# Altium PCB PCB1.PcbDoc (part 1 of 2)
Units mil, origin at the board's own origin, x right, y up, seen from the top; angles counter-clockwise.
Board outline 6380 x 3360 mil, 2 copper layers (Top Layer, Bottom Layer); 138 components, 156 nets, 538 pads, 20 vias.
Unrouted connection lines stored in the file: 3.
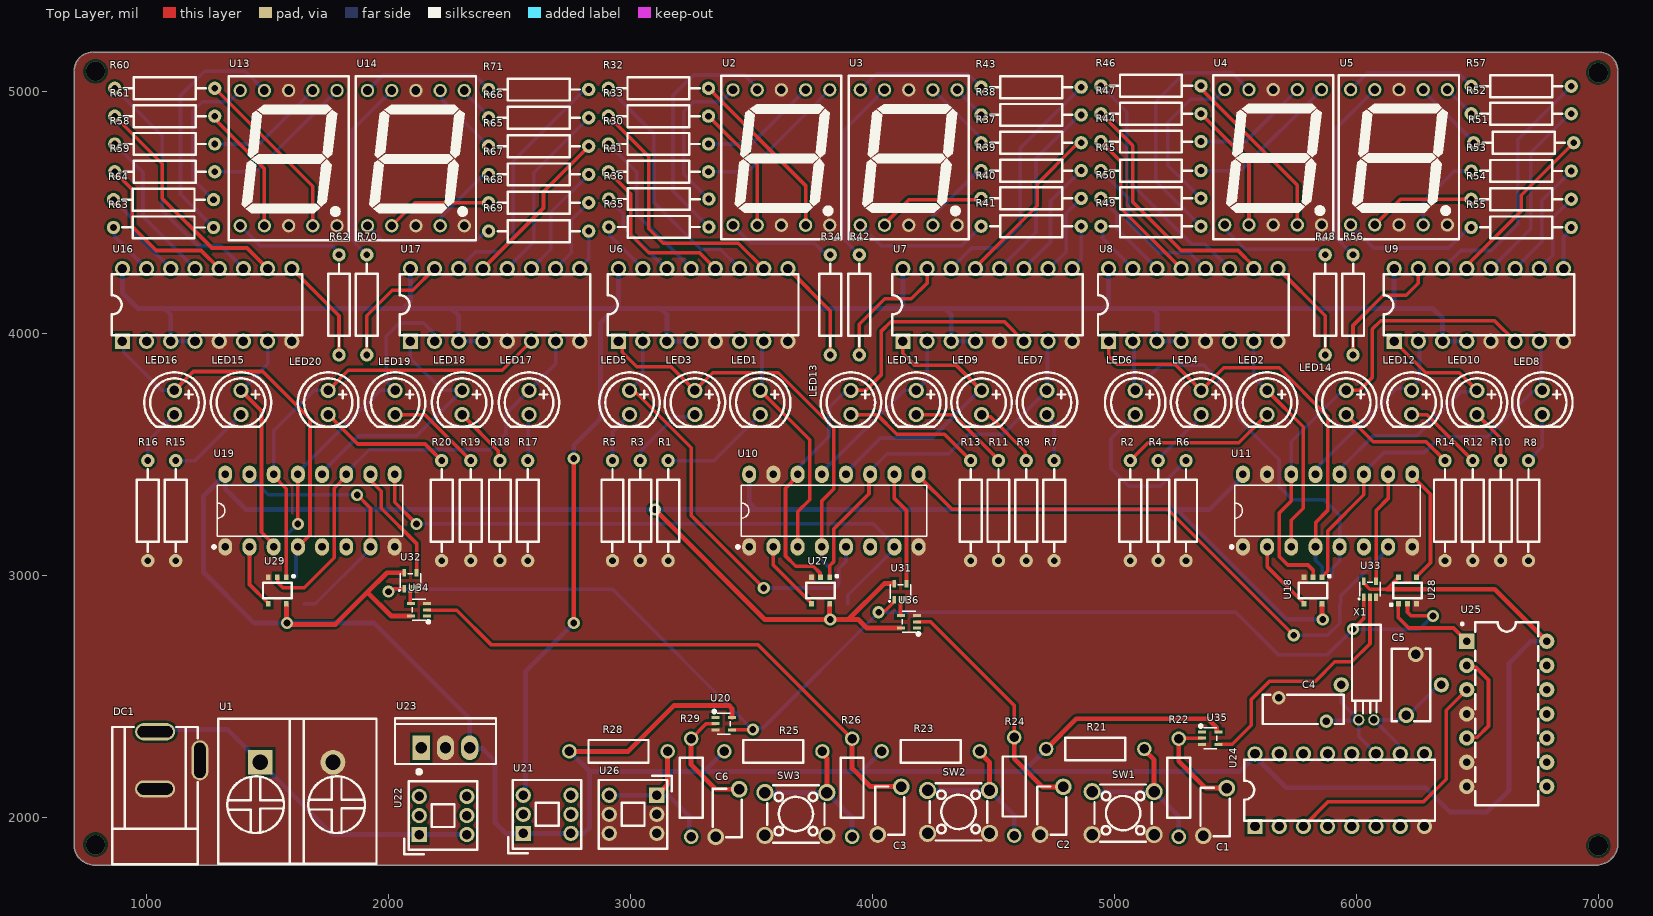
[diagram p0: Top Layer view]
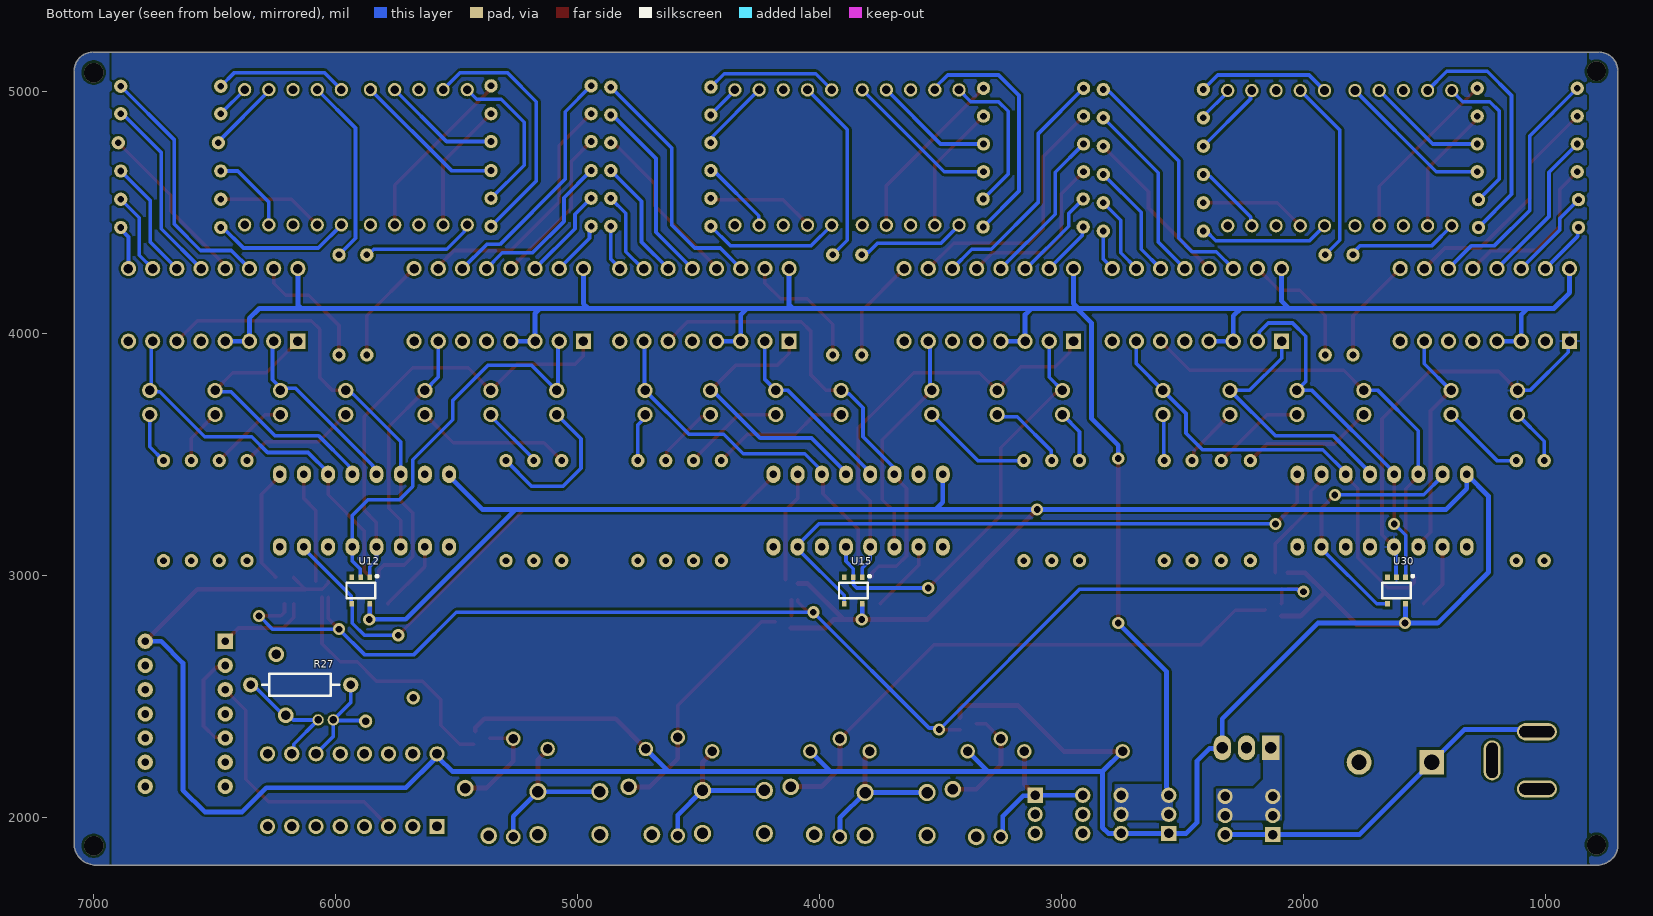
[diagram p1: Bottom Layer view, seen from below]

## Layer stack, top to bottom
Top Solder: solder mask 0.4, Solder Resist, Dk 3.5
Top Layer: signal copper 1.4
Dielectric 1: dielectric 12.6, FR-4, Dk 4.8
Bottom Layer: signal copper 1.4
Bottom Solder: solder mask 0.4, Solder Resist, Dk 3.5

## Board outline
785,1805 6990,1805 ccw(c6990,1895) 7080,1895 7080,5085 ccw(c7000.01,5085.01) 7000,5165 780,5165 ccw(c780,5085) 700,5085 700,1890 ccw(c785,1890)

## Design rules (kind name [scope] priority, off if disabled: settings)
Clearance [All] p1: gap=10 ignorepadtopadclearanceinfootprint=FALSE except(8: SMDPad-SMDPad)
PolygonConnect PolygonConnect_5 [All vs IsNamedPolygon('GND_L01_P005')] p1: connectstyle=Direct reliefconductorwidth=10 reliefentries=4 polygonreliefangle="90 Angle" airgapwidth=10
PolygonConnect PolygonConnect_4 [All vs IsNamedPolygon('NONET_L02_P005')] p2: connectstyle=Direct reliefconductorwidth=10 reliefentries=4 polygonreliefangle="90 Angle" airgapwidth=10
PolygonConnect PolygonConnect_3 [All vs IsNamedPolygon('NONET_L-01_P-001')] p3: connectstyle=Direct reliefconductorwidth=10 reliefentries=4 polygonreliefangle="90 Angle" airgapwidth=10
PolygonConnect PolygonConnect_2 [All vs IsNamedPolygon('NONET_L-01_P-001')] p4: thpad.connectstyle=Direct thpad.reliefconductorwidth=10 thpad.reliefentries=4 thpad.polygonreliefangle="90 Angle" thpad.airgapwidth=10 smdpad.connectstyle=Direct smdpad.reliefconductorwidth=10 smdpad.reliefentries=4 smdpad.polygonreliefangle="90 Angle" smdpad.airgapwidth=10 via.connectstyle=Relief via.reliefconductorwidth=10 via.reliefentries=4 via.polygonreliefangle="90 Angle" via.airgapwidth=10
PolygonConnect PolygonConnect_1 [All vs IsNamedPolygon('NONET_L-01_P-001')] p5: connectstyle=Direct reliefconductorwidth=10 reliefentries=4 polygonreliefangle="90 Angle" airgapwidth=10
PolygonConnect [All] p6: connectstyle=Relief reliefconductorwidth=10 reliefentries=4 polygonreliefangle="90 Angle" airgapwidth=10
RoutingVias [All] p1: holewidth=28 width=50 viastyle="Through Hole" minholewidth=28 minwidth=50 maxholewidth=28 maxwidth=50
SolderMaskExpansion [All] p1: expansion=4 istentingtop=FALSE
SupplyNets "Schematic Supply Nets_3" [InNet('GND')] p1: voltage=0.000
SupplyNets "Schematic Supply Nets_1" [InNet('+D5V')] p2: voltage=0.000
SupplyNets "Schematic Supply Nets" [InNet('+5')] p3: voltage=0.000
Width [All] p1: maxlimit=50 minlimit=10 preferedwidth=15 minimp=50.000000 maximp=50.000000 favimp=50.000000
30 further rules are at their usual default settings.

## Classes and differential pairs
component class Display_SEC_MIN: LED1 LED2 LED3 LED4 LED5 LED6 LED7 LED8 LED9 LED10 LED11 LED12 LED13 LED14 R1 R2 R3 R4 R5 R6 R7 R8 R9 R10 R11 R12 R13 R14 R30 R31 R32 R33 R34 R35 R36 R37 R38 R39 R40 R41 R42 R43 R44 R45 R46 R47 R48 R49 R50 R51 R52 R53 R54 R55 R56 R57 U2 U3 U4 U5 U6 U7 U8 U9 U10 U11
component class Display_Hour: LED15 LED16 LED17 LED18 LED19 LED20 R15 R16 R17 R18 R19 R20 R58 R59 R60 R61 R62 R63 R64 R65 R66 R67 R68 R69 R70 R71 U12 U13 U14 U15 U16 U17 U18 U19 U20 U27 U28 U29 U30 U31 U32 U33 U34 U35 U36
component class CLK_SW: C1 C2 C3 C4 C5 C6 DC1 R21 R22 R23 R24 R25 R26 R27 R28 R29 SW1 SW2 SW3 U1 U21 U22 U23 U24 U25 U26 X1

## Components (designator, comment, footprint, x,y, rotation, side; value= is the part's Value field where it differs from the comment)
C1 "100pF" CAP-TH_L5.0-W3.0-P5.00-D0.6-S2.45 5415,2025 r90 top locked
C2 "100pF" CAP-TH_L5.0-W3.0-P5.00-D0.6-S2.45 4740,2030 r90 top locked
C3 "100pF" CAP-TH_L5.0-W3.0-P5.00-D0.6-S2.45 4070,2030 r90 top locked
C4 "560pF" CAP-TH_L8.5-W3.0-P5.00-D0.6-S2.5 5776.58,2448.23 r0 top
C5 "22pF" CAP-TH_L7.4-W4.0-P6.40-D0.5-S1.00 6225,2550 r270 top
C6 "100pF" CAP-TH_L5.0-W3.0-P5.00-D0.6-S2.45 3400,2020 r90 top locked
DC1 "DC-005-2.5A-2.0" CONN-TH_DC-005-2.5A-2.0 1127.53,2238.1 r90 top locked
LED1 "WP7113ID" LED-TH_BD5.0-P2.54-FD 3535.52,3716.7 r270 top locked
LED2 "WP7113ID" LED-TH_BD5.0-P2.54-FD 5630,3716.7 r270 top locked
LED3 "WP7113ID" LED-TH_BD5.0-P2.54-FD 3265.52,3716.7 r270 top locked
LED4 "WP7113ID" LED-TH_BD5.0-P2.54-FD 5357.5,3716.7 r270 top locked
LED5 "WP7113ID" LED-TH_BD5.0-P2.54-FD 2995.52,3716.7 r270 top locked
LED6 "WP7113ID" LED-TH_BD5.0-P2.54-FD 5085,3716.7 r270 top locked
LED7 "WP7113ID" LED-TH_BD5.0-P2.54-FD 4720.21,3716.7 r270 top locked
LED8 "WP7113ID" LED-TH_BD5.0-P2.54-FD 6767.15,3716.7 r270 top locked
LED9 "WP7113ID" LED-TH_BD5.0-P2.54-FD 4450.21,3716.7 r270 top locked
LED10 "WP7113ID" LED-TH_BD5.0-P2.54-FD 6497.15,3716.7 r270 top locked
LED11 "WP7113ID" LED-TH_BD5.0-P2.54-FD 4180.21,3716.7 r270 top locked
LED12 "WP7113ID" LED-TH_BD5.0-P2.54-FD 6227.15,3716.7 r270 top locked
LED13 "WP7113ID" LED-TH_BD5.0-P2.54-FD 3910.21,3716.7 r270 top locked
LED14 "WP7113ID" LED-TH_BD5.0-P2.54-FD 5957.15,3716.7 r270 top locked
LED15 "WP7113ID" LED-TH_BD5.0-P2.54-FD 1390,3716.7 r270 top locked
LED16 "WP7113ID" LED-TH_BD5.0-P2.54-FD 1115,3716.7 r270 top locked
LED17 "WP7113ID" LED-TH_BD5.0-P2.54-FD 2580.21,3716.7 r270 top locked
LED18 "WP7113ID" LED-TH_BD5.0-P2.54-FD 2303.55,3716.7 r270 top locked
LED19 "WP7113ID" LED-TH_BD5.0-P2.54-FD 2026.88,3716.7 r270 top locked
LED20 "WP7113ID" LED-TH_BD5.0-P2.54-FD 1750.21,3716.7 r270 top locked
R1 "330Ω" RES-TH_BD2.3-L6.5-P10.50-D0.5 3155,3270 r270 top locked
R2 "330Ω" RES-TH_BD2.3-L6.5-P10.50-D0.5 5065,3270 r270 top locked
R3 "330Ω" RES-TH_BD2.3-L6.5-P10.50-D0.5 3040,3270 r270 top locked
R4 "330Ω" RES-TH_BD2.3-L6.5-P10.50-D0.5 5180,3270 r270 top locked
R5 "330Ω" RES-TH_BD2.3-L6.5-P10.50-D0.5 2925,3270 r270 top locked
R6 "330Ω" RES-TH_BD2.3-L6.5-P10.50-D0.5 5295,3270 r270 top locked
R7 "330Ω" RES-TH_BD2.3-L6.5-P10.50-D0.5 4750,3270 r90 top locked
R8 "330Ω" RES-TH_BD2.3-L6.5-P10.50-D0.5 6710,3270 r90 top locked
R9 "330Ω" RES-TH_BD2.3-L6.5-P10.50-D0.5 4635,3270 r90 top locked
R10 "330Ω" RES-TH_BD2.3-L6.5-P10.50-D0.5 6595,3270 r90 top locked
R11 "330Ω" RES-TH_BD2.3-L6.5-P10.50-D0.5 4520,3270 r90 top locked
R12 "330Ω" RES-TH_BD2.3-L6.5-P10.50-D0.5 6480,3270 r90 top locked
R13 "330Ω" RES-TH_BD2.3-L6.5-P10.50-D0.5 4405,3270 r90 top locked
R14 "330Ω" RES-TH_BD2.3-L6.5-P10.50-D0.5 6365,3270 r90 top locked
R15 "330Ω" RES-TH_BD2.3-L6.5-P10.50-D0.5 1120,3270 r270 top locked
R16 "330Ω" RES-TH_BD2.3-L6.5-P10.50-D0.5 1005,3270 r270 top locked
R17 "330Ω" RES-TH_BD2.3-L6.5-P10.50-D0.5 2575,3270 r90 top locked
R18 "330Ω" RES-TH_BD2.3-L6.5-P10.50-D0.5 2460.04,3270 r90 top locked
R19 "330Ω" RES-TH_BD2.3-L6.5-P10.50-D0.5 2339.48,3270 r90 top locked
R20 "330Ω" RES-TH_BD2.3-L6.5-P10.50-D0.5 2218.93,3270 r90 top locked
R21 "10kΩ" RES-TH_BD2.4-L6.3-P10.30-D0.6 4920,2285 r180 top locked
R22 "10kΩ" RES-TH_BD2.4-L6.3-P10.30-D0.6 5265,2125 r270 top locked
R23 "10kΩ" RES-TH_BD2.4-L6.3-P10.30-D0.6 4240,2275 r180 top locked
R24 "10kΩ" RES-TH_BD2.4-L6.3-P10.30-D0.6 4585,2130 r270 top locked
R25 "10kΩ" RES-TH_BD2.4-L6.3-P10.30-D0.6 3590,2275 r180 top locked
R26 "10kΩ" RES-TH_BD2.4-L6.3-P10.30-D0.6 3915,2125 r270 top locked
R27 "10MΩ" RES-TH_BD2.2-L6.5-P10.50-D0.6 6143.31,2550 r0 bottom
R28 "10kΩ" RES-TH_BD2.4-L6.3-P10.30-D0.6 2950,2275 r180 top locked
R29 "10kΩ" RES-TH_BD2.4-L6.3-P10.30-D0.6 3250,2125 r270 top locked
R30 "330Ω" RES-TH_BD2.3-L6.5-P10.50-D0.5 3115,4785 r0 top locked
R31 "330Ω" RES-TH_BD2.3-L6.5-P10.50-D0.5 3115,4670 r0 top locked
R32 "330Ω" RES-TH_BD2.3-L6.5-P10.50-D0.5 3115,5015 r0 top locked
R33 "330Ω" RES-TH_BD2.3-L6.5-P10.50-D0.5 3115,4900 r0 top locked
R34 "330Ω" RES-TH_BD2.3-L6.5-P10.50-D0.5 3825,4120 r90 top locked
R35 "330Ω" RES-TH_BD2.3-L6.5-P10.50-D0.5 3116.75,4441.96 r0 top locked
R36 "330Ω" RES-TH_BD2.3-L6.5-P10.50-D0.5 3116.75,4557.57 r0 top locked
R37 "330Ω" RES-TH_BD2.3-L6.5-P10.50-D0.5 4655,4790 r180 top locked
R38 "330Ω" RES-TH_BD2.3-L6.5-P10.50-D0.5 4655,4905 r180 top locked
R39 "330Ω" RES-TH_BD2.3-L6.5-P10.50-D0.5 4655,4675 r180 top locked
R40 "330Ω" RES-TH_BD2.3-L6.5-P10.50-D0.5 4655,4560 r180 top locked
R41 "330Ω" RES-TH_BD2.3-L6.5-P10.50-D0.5 4655,4445 r180 top locked
R42 "330Ω" RES-TH_BD2.3-L6.5-P10.50-D0.5 3945,4120 r90 top locked
R43 "330Ω" RES-TH_BD2.3-L6.5-P10.50-D0.5 4655,5020 r180 top locked
R44 "330Ω" RES-TH_BD2.3-L6.5-P10.50-D0.5 5150,4795 r0 top locked
R45 "330Ω" RES-TH_BD2.3-L6.5-P10.50-D0.5 5150,4675 r0 top locked
R46 "330Ω" RES-TH_BD2.3-L6.5-P10.50-D0.5 5150,5025 r0 top locked
R47 "330Ω" RES-TH_BD2.3-L6.5-P10.50-D0.5 5150,4910 r0 top locked
R48 "330Ω" RES-TH_BD2.3-L6.5-P10.50-D0.5 5870,4120 r90 top locked
R49 "330Ω" RES-TH_BD2.3-L6.5-P10.50-D0.5 5150,4445 r0 top locked
R50 "330Ω" RES-TH_BD2.3-L6.5-P10.50-D0.5 5150,4560.83 r0 top locked
R51 "330Ω" RES-TH_BD2.3-L6.5-P10.50-D0.5 6690,4790 r180 top locked
R52 "330Ω" RES-TH_BD2.3-L6.5-P10.50-D0.5 6680,4910 r180 top locked
R53 "330Ω" RES-TH_BD2.3-L6.5-P10.50-D0.5 6680,4673.33 r180 top locked
R54 "330Ω" RES-TH_BD2.3-L6.5-P10.50-D0.5 6680,4556.67 r180 top locked
R55 "330Ω" RES-TH_BD2.3-L6.5-P10.50-D0.5 6680,4440 r180 top locked
R56 "330Ω" RES-TH_BD2.3-L6.5-P10.50-D0.5 5985,4120 r90 top locked
R57 "330Ω" RES-TH_BD2.3-L6.5-P10.50-D0.5 6680,5023.33 r180 top locked
R58 "330Ω" RES-TH_BD2.3-L6.5-P10.50-D0.5 1075,4785 r0 top locked
R59 "330Ω" RES-TH_BD2.3-L6.5-P10.50-D0.5 1075,4670 r0 top locked
R60 "330Ω" RES-TH_BD2.3-L6.5-P10.50-D0.5 1075,5015 r0 top locked
R61 "330Ω" RES-TH_BD2.3-L6.5-P10.50-D0.5 1075,4900 r0 top locked
R62 "330Ω" RES-TH_BD2.3-L6.5-P10.50-D0.5 1795,4120 r90 top locked
R63 "330Ω" RES-TH_BD2.3-L6.5-P10.50-D0.5 1070,4440 r0 top locked
R64 "330Ω" RES-TH_BD2.3-L6.5-P10.50-D0.5 1070,4555 r0 top locked
R65 "330Ω" RES-TH_BD2.3-L6.5-P10.50-D0.5 2620,4776 r180 top locked
R66 "330Ω" RES-TH_BD2.3-L6.5-P10.50-D0.5 2620,4893 r180 top locked
R67 "330Ω" RES-TH_BD2.3-L6.5-P10.50-D0.5 2620,4659 r180 top locked
R68 "330Ω" RES-TH_BD2.3-L6.5-P10.50-D0.5 2620,4542 r180 top locked
R69 "330Ω" RES-TH_BD2.3-L6.5-P10.50-D0.5 2620,4425 r180 top locked
R70 "330Ω" RES-TH_BD2.3-L6.5-P10.50-D0.5 1910,4120 r90 top locked
R71 "330Ω" RES-TH_BD2.3-L6.5-P10.50-D0.5 2620,5010 r180 top locked
SW1 "TS665CJ" SW-TH_4P-L6.0-W6.0-P4.50-LS6.5 5035,2020 r0 top locked
SW2 "TS665CJ" SW-TH_4P-L6.0-W6.0-P4.50-LS6.5 4355,2025 r0 top locked
SW3 "TS665CJ" SW-TH_4P-L6.0-W6.0-P4.50-LS6.5 3682.95,2016.42 r0 top locked
U1 "DBT50G-7.62-2P" CONN-TH_2P-P7.62_L15.2-W16.7-EX4.2 1620,2230 r0 top locked
U2 "HDSP-5501" LED-SEG-TH_HDSP-A 3623.03,4729.02 r0 top locked
U3 "HDSP-5501" LED-SEG-TH_HDSP-A 4149.09,4729.02 r0 top locked
U4 "HDSP-5501" LED-SEG-TH_HDSP-A 5655,4730 r0 top locked
U5 "HDSP-5501" LED-SEG-TH_HDSP-A 6175,4730 r0 top locked
U6 "CD4511BE" DIP-16_L19.8-W6.5-P2.54-LS7.6-BL 3300,4120 r0 top locked
U7 "CD4511BE" DIP-16_L19.8-W6.5-P2.54-LS7.6-BL 4475.01,4120 r0 top locked
U8 "CD4511BE" DIP-16_L19.8-W6.5-P2.54-LS7.6-BL 5325.01,4120 r0 top locked
U9 "CD4511BE" DIP-16_L19.8-W6.5-P2.54-LS7.6-BL 6505.01,4120 r0 top locked
U10 "CD4518BE" DIP-16_L19.3-W6.4-P2.54-LS7.6-BL 3840,3270 r0 top locked
U11 "CD4518BE" DIP-16_L19.3-W6.4-P2.54-LS7.6-BL 5880,3270 r0 top locked
U12 "BD7LS08G-CTL" SSOP-5_L3.0-W1.6-P0.95-LS2.8-BR 5895,2940 r90 bottom locked
U13 "HDSP-5501" LED-SEG-TH_HDSP-A 1586.86,4726.42 r0 top locked
U14 "HDSP-5501" LED-SEG-TH_HDSP-A 2112.92,4726.42 r0 top locked
U15 "BD7LS08G-CTL" SSOP-5_L3.0-W1.6-P0.95-LS2.8-BR 3860,2940 r90 bottom
U16 "CD4511BE" DIP-16_L19.8-W6.5-P2.54-LS7.6-BL 1250.01,4120 r0 top locked
U17 "CD4511BE" DIP-16_L19.8-W6.5-P2.54-LS7.6-BL 2440,4120 r0 top locked
U18 "BD7LS08G-CTL" SSOP-5_L3.0-W1.6-P0.95-LS2.8-BR 5820,2940 r90 top locked
U19 "CD4518BE" DIP-16_L19.3-W6.4-P2.54-LS7.6-BL 1675,3270 r0 top locked
U20 "SN74AHC1GU04DCKR" SOT-353_L2.1-W1.3-P0.65-LS2.3-BR 3385,2390 r180 top
U21 "PS-7054DVB-6PL" SW-TH_6P-L7.0-W7.0-P2.00 2655,2015 r180 top locked
U22 "PS-7054DVB-6PL" SW-TH_6P-L7.0-W7.0-P2.00 2225,2010 r180 top locked
U23 "L7805CV-DG" TO-220-3_L10.0-W4.5-P2.54-L 2235,2290 r0 top locked
U24 "CD4060BE" DIP-16_L19.8-W6.5-P2.54-LS7.6-BL 5930,2115 r0 top locked
U25 "CD4013BE" DIP-14_L19.2-W6.6-P2.54-LS10.9-BL 6620.35,2430 r270 top
U26 "PS-7054DVB-6PL" SW-TH_6P-L7.0-W7.0-P2.00 3010,2015 r0 top locked
U27 "BD7LS08G-CTL" SSOP-5_L3.0-W1.6-P0.95-LS2.8-BR 3785,2940 r90 top locked
U28 "BD7LS08G-CTL" SSOP-5_L3.0-W1.6-P0.95-LS2.8-BR 6210,2940 r270 top
U29 "BD7LS08G-CTL" SSOP-5_L3.0-W1.6-P0.95-LS2.8-BR 1540,2940 r90 top locked
U30 "BD7LS08G-CTL" SSOP-5_L3.0-W1.6-P0.95-LS2.8-BR 1615,2940 r90 bottom locked
U31 "TC7SET32FU,LJ(CT" TSSOP-5_L2.0-W1.3-P0.65-LS2.1-BR 4115,2935 r270 top
U32 "TC7SET32FU,LJ(CT" TSSOP-5_L2.0-W1.3-P0.65-LS2.1-BR 2090,2980 r270 top
U33 "TC7SET32FU,LJ(CT" TSSOP-5_L2.0-W1.3-P0.65-LS2.1-BR 6055,2945 r270 top
U34 "SN74AHC1GU04DCKR" SOT-353_L2.1-W1.3-P0.65-LS2.3-BR 2125,2860 r0 top
U35 "SN74AHC1GU04DCKR" SOT-353_L2.1-W1.3-P0.65-LS2.3-BR 5395,2330 r180 top
U36 "SN74AHC1GU04DCKR" SOT-353_L2.1-W1.3-P0.65-LS2.3-BR 4150,2810 r0 top
X1 "32.768kHz" OSC-TH_BD3.1-P0.8-D0.3 6040,2405 r270 top

## Footprints (in the part's own frame and the unit in brackets; to place one, negate y for a bottom-side part, rotate by r counter-clockwise, add the part's x,y. Pads: shape width x height; smd on the part's side, far side on the other; paste and mask are expansions set on the pad)
CAP-TH_L5.0-W3.0-P5.00-D0.6-S2.45 [mm]
  round 1.75 hole 1.1 paste-2539.97 mask+0.05: 1(-2.5,1.225) 2(2.5,-1.225)
  silkscreen extent -2.54,-1.52 2.54,1.52
CAP-TH_L7.4-W4.0-P6.40-D0.5-S1.00 [mm]
  round 1.65 hole 1 copper offset 0,0 paste-2539.97 mask+0.05: 1(-3.2,0.5) 2(3.2,-0.5)
  silkscreen extent -3.81,-2.03 3.81,2.03
CAP-TH_L8.5-W3.0-P5.00-D0.6-S2.5 [mm]
  round 1.4 hole 0.8: 1(-2.5,1.225) 2(2.5,-1.225)
  silkscreen extent -4.19,-1.52 4.32,1.52
CONN-TH_2P-P7.62_L15.2-W16.7-EX4.2 [mm]
  rect 2.6x2.6 hole 1.6 paste-2539.97 mask+0.051: 1(-3.81,0)
  round 2.6 hole 1.6 paste-2539.97 mask+0.051: 2(3.81,0)
  silkscreen extent -8.22,-10.65 8.38,4.55
CONN-TH_DC-005-2.5A-2.0 [mm]
  oval 1.8x4.2 hole 1.2 slot 3.7 at 90 deg paste-2539.97 mask+0.051: 1(3,2.35) 2(-3,2.35)
  oval 4.2x1.8 hole 1.2 slot 3.7 at 0 deg paste-2539.97 mask+0.051: 3(0,-2.35)
  silkscreen extent -10.9,-2.15 3.5,6.85
DIP-14_L19.2-W6.6-P2.54-LS10.9-BL [mil]
  rect 63x63 hole 32: 1(-300,-165.35)
  round 63 hole 32: 2(-200,-165.35) 3(-100,-165.35) 4(0,-165.35) 5(100,-165.35) 6(200,-165.35) 7(300,-165.35) 8(300,165.35) 9(200,165.35) 10(100,165.35) 11(0,165.35) 12(-100,165.35) 13(-200,165.35) 14(-300,165.35)
  silkscreen extent -378,-189 378,130
DIP-16_L19.3-W6.4-P2.54-LS7.6-BL [mm]
  oval 1.46x1.825 hole 0.8: 1(-8.89,-3.81) 2(-6.35,-3.81) 3(-3.81,-3.81) 4(-1.27,-3.81) 5(1.27,-3.81) 6(3.81,-3.81) 7(6.35,-3.81) 8(8.89,-3.81) 9(8.89,3.81) 10(6.35,3.81) 11(3.81,3.81) 12(1.27,3.81) 13(-1.27,3.81) 14(-3.81,3.81) 15(-6.35,3.81) 16(-8.89,3.81)
  silkscreen extent -10.22,-3.96 9.73,2.67
DIP-16_L19.8-W6.5-P2.54-LS7.6-BL [mm]
  rect 1.6x1.6 hole 1: 1(-8.89,-3.81)
  round 1.6 hole 1 copper offset 0,0: 2(-6.35,-3.81) 3(-3.81,-3.81) 4(-1.27,-3.81) 5(1.27,-3.81) 6(3.81,-3.81) 7(6.35,-3.81) 8(8.89,-3.81) 9(8.89,3.81) 10(6.35,3.81) 11(3.81,3.81) 12(1.27,3.81) 13(-1.27,3.81) 14(-3.81,3.81) 15(-6.35,3.81) 16(-8.89,3.81)
  silkscreen extent -10,-3.2 10,3.2
LED-SEG-TH_HDSP-A [mil]
  round 55.12 hole 35.43: 1(-200,-279.5) 2(-100,-279.5) 3(0,-279.5) 4(100,-279.5) 5(200,-279.5) 6(200,279.5) 7(100,279.5) 8(0,279.5) 9(-100,279.5) 10(-200,279.5)
  silkscreen extent -248,-339 248,339
LED-TH_BD5.0-P2.54-FD [mm]
  round 1.6 hole 1: 1(-1.27,0) 2(1.27,0)
  silkscreen extent -3.17,-3.17 2.54,3.17
OSC-TH_BD3.1-P0.8-D0.3 [mm]
  round 1.2 hole 0.8: 1(0,0.8) 2(0,-0.8)
  silkscreen extent -10,-1.5 -0.7,1.5
RES-TH_BD2.2-L6.5-P10.50-D0.6 [mm]
  round 1.6 hole 0.914: 1(-5.25,0) 2(5.25,0)
  silkscreen extent -4.06,-1.14 4.06,1.14
RES-TH_BD2.3-L6.5-P10.50-D0.5 [mm]
  round 1.4 hole 0.7: 1(-5.25,0) 2(5.25,0)
  silkscreen extent -4.32,-1.15 4.32,1.15
RES-TH_BD2.4-L6.3-P10.30-D0.6 [mil]
  round 60 hole 39.37: 1(-202.76,0) 2(202.76,0)
  silkscreen extent -124,-47 124,47
SOT-353_L2.1-W1.3-P0.65-LS2.3-BR [mm]
  rect 0.839x0.315 smd: 1(0.844,-0.65) 2(0.844,0) 3(0.844,0.65) 4(-0.844,0.65) 5(-0.844,-0.65)
  silkscreen extent -0.7,-1.41 1.15,1.1
SSOP-5_L3.0-W1.6-P0.95-LS2.8-BR [mm]
  rect 0.6x0.5 smd: 1(1.4,-0.95) 2(1.4,0) 3(1.4,0.95) 4(-1.4,0.95) 5(-1.4,-0.95)
  silkscreen extent -0.8,-1.83 1.63,1.5
SW-TH_4P-L6.0-W6.0-P4.50-LS6.5 [mm]
  round 1.8 hole 1.2: 1(-3.25,2.25) 2(3.25,2.25) 3(-3.25,-2.25) 4(3.25,-2.25)
  silkscreen extent -3,-3 3,3
SW-TH_6P-L7.0-W7.0-P2.00 [mm]
  rect 1.6x1.6 hole 1: 1(2.5,2)
  round 1.6 hole 1: 2(2.5,0) 3(2.5,-2) 4(-2.5,2) 5(-2.5,0) 6(-2.5,-2)
  silkscreen extent -3.6,-3.6 4.06,4.06
TO-220-3_L10.0-W4.5-P2.54-L [mm]
  rect 1.8x2.6 hole 1.2: 1(-2.54,0.005)
  oval 1.8x2.6 hole 1.2: 2(0,0.005)
  oval 1.8x2.6 hole 1.2 copper offset 0,0: 3(2.54,-0.005)
  silkscreen extent -5.3,-2.73 5.3,3.09
TSSOP-5_L2.0-W1.3-P0.65-LS2.1-BR [mm]
  rect 0.798x0.4 smd: 1(0.849,-0.65) 2(0.849,0) 3(0.849,0.65) 4(-0.849,0.65) 5(-0.849,-0.65)
  silkscreen extent -0.73,-1.22 1.09,1.08

## Part data
C1 C2 C3 C6: library part Cap_100pF_50V_ceramic, JLCPCB Part Class="Extended Part", LCSC Part Name="100pF ±10% 50V", Manufacturer=SHM(南方宏明), Manufacturer Part=DCT101K20Y5PF6FJ5A0, Temperature Coefficient=Y5P, Tolerance=±10%, Voltage Rating=50V, Add into BOM=yes, Convert to PCB=yes, Datasheet=https://atta.szlcsc.com/upload/public/pdf/source/20210929/C4FEE90C41821237A84737C21615A4EC.pdf, Device=DCT101K20Y5PF6FJ5A0, Pin Spacing=5mm, Supplier=LCSC, Supplier Footprint=插件,P=5mm, Supplier Part=C2896026, Symbol=DCT101K20Y5PF6FJ5A0
C4: library part Cap_560pF_50V_ceraic, JLCPCB Part Class="Extended Part", LCSC Part Name="560pF ±5% 50V", Manufacturer=SHM(南方宏明), Manufacturer Part="DCC561J34SL F6FJ5A0", Temperature Coefficient=SL, Tolerance=±5%, Voltage Rating=50V, Add into BOM=yes, Convert to PCB=yes, Datasheet=https://atta.szlcsc.com/upload/public/pdf/source/20210929/2675BE423E96B4772DBF330AE545E239.pdf, Device="DCC561J34SL F6FJ5A0", Pin Spacing=5mm, Supplier=LCSC, Supplier Footprint=插件,P=5mm, Supplier Part=C2896138, Symbol="DCC561J34SL F6FJ5A0"
C5: library part Cap_22pF_50V_ceramic, JLCPCB Part Class="Extended Part", LCSC Part Name="22pF ±10% 50V", Manufacturer=Dersonic(德尔创), Manufacturer Part=CC1H220KA1EDCH4B1100, Temperature Coefficient=NP0, Tolerance=±10%, Voltage Rating=50V, Add into BOM=yes, Body Thickness=2.4mm, Convert to PCB=yes, Datasheet=https://atta.szlcsc.com/upload/public/pdf/source/20211103/062C09467AB58979163D97626BAD0297.pdf, Device=CC1H220KA1EDCH4B1100, Diameter=4.8mm, Pin Spacing=2.54mm, Supplier=LCSC, Supplier Footprint=插件,P=2.54mm, Supplier Part=C2832510, Symbol=CC1H220KA1EDCH4B1100
DC1: JLCPCB Part Class="Extended Part", Manufacturer="XKB Connection(中国星坤)", Contributor=LCSC, Manufacturer Part=DC-005-2.5A-2.0, spicePre=D, spiceSymbolName=DC-005-2.5A-2.0, Supplier=LCSC, Supplier Part=C319099
LED1 LED2 LED3 LED4 LED5 LED6 LED7 LED8 LED9 LED10 LED11 LED12 LED13 LED14 LED15 LED16 LED17 LED18 LED19 LED20: library part D_LED_2mm_red, Emitted Color=Red, Forward Current=20mA, Forward Voltage (VF)=2V, JLCPCB Part Class="Extended Part", Lens Color="Red Lens", Manufacturer=Kingbright, Add into BOM=yes, Convert to PCB=yes, Datasheet=https://atta.szlcsc.com/upload/public/pdf/source/20241101/124CAE47E7911E6EBC0B1714F77DAFC6.pdf, Device=WP7113ID, Dominant Wavelength=617nm, LCSC Part Name=WP7113ID, Luminous Intensity=40mcd, Manufacturer Part=WP7113ID, Peak Wavelength=627nm, Supplier=LCSC, Supplier Footprint=插件,D=5mm, Supplier Part=C6926004, Symbol=WP7113ID, Viewing Angle=30°
R1 R2 R3 R4 R5 R6 R7 R8 R9 R10 R11 R12 R13 R14 R15 R16 R17 R18 R19 R20 R30 R31 R32 R33 R34 R35 R36 R37 R38 R39 R40 R41 R42 R43 R44 R45 R46 R47 R48 R49 R50 R51 R52 R53 R54 R55 R56 R57 R58 R59 R60 R61 R62 R63 R64 R65 R66 R67 R68 R69 R70 R71: library part Reg_330R_0.25W, JLCPCB Part Class="Extended Part", LCSC Part Name="330Ω ±1% 250mW 金属膜电阻", Manufacturer=CCO(千志电子), Manufacturer Part="MF1/4W-330Ω±1% T", Operating Temperature=-55℃~+155℃, Power(Watts)=250mW, Temperature Coefficient=±100ppm/℃, Tolerance=±1%, Voltage-Supply(Max)=250V, Add into BOM=yes, Convert to PCB=yes, Datasheet=https://atta.szlcsc.com/upload/public/pdf/source/20190910/C427326_62A6D058BC0FF74963A2F22379CA06CE.pdf, Device="MF1/4W-330Ω±1% T", Supplier=LCSC, Supplier Footprint=插件,D2.3xL6.5mm, Supplier Part=C119313, Symbol="MF1/4W-330Ω±1% T52", Type="Metal Film Resistors"
R21 R22 R23 R24 R25 R26 R28 R29: library part Reg_10k_0.25W, JLCPCB Part Class="Extended Part", LCSC Part Name="10kΩ ±1% 250mW 金属膜电阻", Manufacturer=Tyohm(幸亚电阻), Manufacturer Part=RN1/4W10KFT/BA1, Operating Temperature Range=-55℃~+125℃, Overload Voltage (Max)=250V, Power(Watts)=250mW, Temperature Coefficient=±50ppm/℃, Tolerance=±1%, Add into BOM=yes, Convert to PCB=yes, Datasheet=https://atta.szlcsc.com/upload/public/pdf/source/20190808/C410699_D126E64D28B638F1D73B58E9F61DFD9B.pdf, Device=RN1/4W10KFT/BA1, Supplier=LCSC, Supplier Footprint=插件,D2.4xL6.5mm, Supplier Part=C410695, Symbol="RN 1/4W 10K F T/B A1", Type="Metal Film Resistors"
R27: library part Reg_10M_0.25W, JLCPCB Part Class="Extended Part", LCSC Part Name="10MΩ ±5% 250mW 碳膜电阻", Manufacturer=CCO(千志电子), Manufacturer Part="CF1/4W-10MΩ±5% T", Operating Temperature=-55℃~+155℃, Power(Watts)=250mW, Temperature Coefficient=-1500ppm/℃~0ppm/℃, Tolerance=±5%, Voltage-Supply(Max)=250V, Add into BOM=yes, Convert to PCB=yes, Datasheet=https://atta.szlcsc.com/upload/public/pdf/source/20190910/C427328_A0A2D65F3FD547937F4E674C90868175.pdf, Device="CF1/4W-10MΩ±5% T", Supplier=LCSC, Supplier Footprint=插件,D2.3xL6.5mm, Supplier Part=C127261, Symbol=CF1/4W-10MΩ±5%, Type="Carbon Resister"
SW1 SW2 SW3: Contact Current=50mA, JLCPCB Part Class="Extended Part", LCSC Part Name="6*6*5mm 直插 轻触开关", Manufacturer="SHOU HAN(首韩)", Voltage Rating (DC)=12V, Actuator Style="Round Button", Add into BOM=yes, Circuit=SPST, Convert to PCB=yes, Datasheet=https://atta.szlcsc.com/upload/public/pdf/source/20190521/C393938_BDABEAC600B4C55E200A80AA129B70BC.pdf, Device=TS665CJ, Manufacturer Part=TS665CJ, Mechanical Life=-, Mounting Style=Straight, Supplier=LCSC, Supplier Footprint=插件, Supplier Part=C393938, Switch Height=5mm, Switch Length=6mm, Switch Width=6mm, Symbol=TS665CJ, With Lamp=-
U1: JLCPCB Part Class="Extended Part", Manufacturer=DORABO(地博电气), Manufacturer Part=DBT50G-7.62-2P-BK-P, Contributor=LCSC, spicePre=U, spiceSymbolName=DBT50G-7.62-2P, Supplier=LCSC, Supplier Part=C496127
U2 U3 U4 U5 U13 U14: JLCPCB Part Class="Extended Part", Manufacturer=Broadcom/AVAGO(安华高), Add into BOM=yes, Convert to PCB=yes, Datasheet=https://atta.szlcsc.com/upload/public/pdf/source/20230925/D6197A9C41D1E502B523821274CC57EA.pdf, Device=HDSP-5501_C18198807, LCSC Part Name=HDSP-5501, Manufacturer Part=HDSP-5501, Supplier=LCSC, Supplier Footprint=插件, Supplier Part=C18198807, Symbol=HDSP-5501_C18198807
U6 U7 U8 U9 U16 U17: library part CD4511BE_C507153, JLCPCB Part Class="Extended Part", LCSC Part Name="CMOS BCD 到 7 段 LED 锁存解码器驱动器", Manufacturer=HGSEMI(华冠), Add into BOM=yes, Convert to PCB=yes, Datasheet=https://atta.szlcsc.com/upload/public/pdf/source/20220513/69A3CD8936477BC6706446B8F2E34C07.pdf, Device=CD4511BE_C507153, Manufacturer Part=CD4511BE, Supplier=LCSC, Supplier Footprint=DIP-16, Supplier Part=C507153, Symbol=CD4511BE_C507153
U10 U11 U19: JLCPCB Part Class="Extended Part", Manufacturer=TI(德州仪器), Operating Temperature=-55℃~+125℃, Voltage - Supply=3V~18V, Add into BOM=yes, Convert to PCB=yes, Count Rate=8MHz, Datasheet=https://www.ti.com/cn/lit/gpn/cd4518b, Device=CD4518BE, Direction="Rising Edge；Falling Edge", LCSC Part Name=CD4518BE, Logic Type=BCDCounter, Manufacturer Part=CD4518BE, Number of Elements=2, Reset=Asynchronous, Supplier=LCSC, Supplier Footprint=DIP-16, Supplier Part=C5220, Symbol=CD4518BE, Timing=Synchronous
U12 U15 U18 U27 U28 U29 U30: library part AND_BD7LS08G-CTL, JLCPCB Part Class="Extended Part", Manufacturer=ROHM(罗姆), Operating Temperature=-40℃~+125℃, Quiescent Current (Max)=10uA, Sink Current=32mA, Supply Voltage=1.65V~5.5V, Add into BOM=yes, Convert to PCB=yes, Device=BD7LS08G-CTL, LCSC Part Name=BD7LS08G-CTL, Logic Gate Type=与门, Manufacturer Part=BD7LS08G-CTL, Number of Channels=1, Propagation Delay Time=10ns@5V,50pF, Source Current=32mA, Supplier=LCSC, Supplier Footprint=SSOP-5, Supplier Part=C4471342, Symbol=BD7LS08G-CTL
U20 U34 U35 U36: library part NOT_SN74AHC1GU04DCKR_C7472, JLCPCB Part Class="Extended Part", LCSC Part Name=单路反相器, Manufacturer=TI(德州仪器), Operating Temperature=-40℃~+85℃, Sink Current=8mA, Supply Current (Max)=1uA, Supply Voltage(Single)=2V~5.5V, Add into BOM=yes, Convert to PCB=yes, Datasheet=https://www.ti.com/cn/lit/gpn/sn74ahc1gu04, Device=SN74AHC1GU04DCKR_C7472, High Level Range (VIH)=1.7V~4.4V, Input Type=-, Low Level Range (VIL)=300mV~1.1V, Manufacturer Part=SN74AHC1GU04DCKR, Max Propagation Delay=7ns@5V,50pF, Number of Circuits=1, Number of Inputs=1, Series=74AHCSeries, Source Current=8mA, Supplier=LCSC, Supplier Footprint=SOT-353, Supplier Part=C7472, Symbol=SN74AHC1GU04DCKR_C7472
U21 U22 U26: JLCPCB Part Class="Extended Part", LCSC Part Name=7*7自锁按键开关, Manufacturer=G-Switch(品赞), Operating Force=250gf, Add into BOM=yes, Convert to PCB=yes, Datasheet=https://atta.szlcsc.com/upload/public/pdf/source/20240319/F2B7FB2723231C6F1D5F9BB35EBA5342.pdf, Device=PS-7054DVB-6PL, Manufacturer Part=PS-7054DVB-6PL, Self Lock / No Lock=LATCHING, Supplier=LCSC, Supplier Footprint=插件-6P,7x7mm, Supplier Part=C22363819, Symbol=PS-7054DVB-6PL
U23: Dropout Voltage=2V@(1A), JLCPCB Part Class="Extended Part", LCSC Part Name=正稳压器IC, Manufacturer=ST(意法半导体), Maximum Input Voltage=35V, Operating Temperature=0℃~+125℃, Output Current=1.5A, Output Voltage=5V, Power Supply Rejection Ratio (PSRR)=62dB@(120Hz), standby current=8mA, Add into BOM=yes, Convert to PCB=yes, Datasheet=https://atta.szlcsc.com/upload/public/pdf/source/20140724/1457707163191.pdf, Device=L7805CV-DG, Feature="Short-Circuit  Protection；Thermal Protection(TSD)；Overcurrent Protection(OCP)", Manufacturer Part=L7805CV-DG, Number of Outputs=1, Output Polarity="Positive electrode", Output Type=Fixed, Supplier=LCSC, Supplier Footprint=TO-220, Supplier Part=C3795, Symbol=L7805CV-DG
U24: JLCPCB Part Class="Extended Part", LCSC Part Name="CMOS 14 级纹波进位二进制计数器/除法器和振荡器", Manufacturer=HGSEMI(华冠), Add into BOM=yes, Convert to PCB=yes, Datasheet=https://atta.szlcsc.com/upload/public/pdf/source/20200730/C507159_CD40804D6EEA04930EB86D9D2459BFCA.pdf, Device=CD4060BE, Manufacturer Part=CD4060BE, Supplier=LCSC, Supplier Footprint=DIP-16, Supplier Part=C507159, Symbol=CD4060BE_C507159
U25: Clock Frequency=24MHz, Current - Output High(IOH)=6.8mA, Input Capacitance=5pF, JLCPCB Part Class="Extended Part", Manufacturer=TI(德州仪器), Operating Temperature=-55℃~+125℃, Quiescent Current=4uA, Voltage - Supply=3V~18V, Add into BOM=yes, Convert to PCB=yes, Current - Output Low(IOL)=6.8mA, Datasheet=https://www.ti.com/cn/lit/gpn/cd4013b, Device=CD4013BE, Function="Positioning and resetting", LCSC Part Name=CD4013BE, Manufacturer Part=CD4013BE, Number of Bits per Element=1, Number of Elements=2, Output Type="Complementary Type", Propagation Delay=90ns@15V,50pF, Series=4000BSeries, Supplier=LCSC, Supplier Footprint=DIP-14, Supplier Part=C5199, Symbol=CD4013BE, Trigger Type="Rising Edge", Type=D-Type
U31 U32 U33: library part OR_GATE_TC7SET32FU,LJ(CT, JLCPCB Part Class="Extended Part", Manufacturer=TOSHIBA(东芝), Operating Temperature=-40℃~+85℃, Quiescent Current (Max)=2uA, Sink Current=8mA, Supply Voltage=4.5V~5.5V, Add into BOM=yes, Convert to PCB=yes, Datasheet=https://atta.szlcsc.com/upload/public/pdf/source/231023/inline-d04b01c8ac5c233d4c0f3d416dbdd867.pdf, Device=TC7SET32FU,LJ(CT, High Level Range (VIH)=2V, LCSC Part Name=TC7SET32FU,LJ(CT, Logic Gate Type=ORGate, Low Level Range (VIL)=800mV, Manufacturer Part=TC7SET32FU,LJ(CT, Number of Channels=1, Propagation Delay Time=9ns@5V,50pF, Series=TC7SETSeries, Source Current=8mA, Supplier=LCSC, Supplier Footprint=SSOP-5, Supplier Part=C7360615, Symbol=TC7SET32FU,LJ(CT
X1: library part AB38T-32.768KHZ, Equivalent Series Resistance (ESR)=30kΩ, Frequency Stability(Full temperature range)=-, JLCPCB Part Class="Extended Part", LCSC Part Name="32.768kHz ±20ppm 12.5pF", Manufacturer=ABRACON, Normal temperature Frequency Tolerance=±20ppm, Add into BOM=yes, Convert to PCB=yes, Crystal Type=-, Datasheet=https://atta.szlcsc.com/upload/public/pdf/source/20180613/C194002_28532E064E51A8E79CA51D5C8B24387E.pdf, Device=AB38T-32.768KHZ, Manufacturer Part=AB38T-32.768KHZ, Supplier=LCSC, Supplier Footprint=DT-38, Supplier Part=C194002, Symbol=AB38T-32.768KHZ

## Via types
v1: diameter 50, hole 28, Top Layer to Bottom Layer, 16 vias
v2: diameter 80, hole 80, Top Layer to Bottom Layer, 4 vias

## Nets (pads, with @x,y where several pads share a name; then routed paths per layer and width w, separated by ;. In a path a pad name is that pad's centre, name@x,y a point inside that pad or via, vN(x,y) a via of type N, cw(c..) or ccw(c..) an arc to the next point about the centre after c; other vN are vias at no path point)
1H1: LED17.1 U17.7 U19.11 U29.2 | length 1881.5
  Top Layer w15: U29.2 1542.34,2992.77 1542.34,2972.66 1563.79,2951.21 1651.21,2951.21 1775,3075 1775,3362.82 1825,3412.82 U19.11
  Bottom Layer w15: U19.11 1825,3427.18 1919.56,3521.75 2416.75,3521.75 2485,3590 2485,3671.49 LED17.1 2690,3876.49 U17.7
1H2: LED18.1 U17.1 U19.12 | length 1065.1
  Bottom Layer w15: U19.12 1725,3427.18 1877.82,3580 2116.84,3580 LED18.1 2223.3,3766.7 2090,3900 U17.1
1H3: LED19.1 U17.2 U19.13 U30.1 | length 1504.2
  Top Layer w15: v1(1625,3215) U19.13
  Bottom Layer w15: U30.1 1577.6,3167.6 v1(1625,3215) ; U19.13 1625,3427.18 1964.52,3766.7 LED19.1 1990,3803.58 1990,3990 2045,4045 2145,4045 2181.82,4008.18 2181.82,3978.17 U17.2
1H4: LED20.1 U17.6 U19.14 U29.1 | length 1844.9
  Top Layer w15: U19.14 1525,3412.82 1577.4,3360.41 U29.1 ; LED20.1 1833.51,3850 2470,3850 U17.6
  Bottom Layer w15: U19.14 1525,3600 1691.7,3766.7 LED20.1
1H_CLK: U10.7 U15.4 U19.9 | length 2575.7
  Top Layer w15: U19.9 2025,3305 v1(2115,3215)
  Bottom Layer w15: v1(2115,3215) 4002.18,3215 4090,3127.18 U10.7 4090,3112.82 3897.4,2920.22 U15.4
1H_EN: U19.10 U32.4 | length 485.5
  Top Layer w15: U19.10 1933.13,3411.87 1933.13,3386.87 1970,3350 1970,3280 2115.59,3134.41 U32.4
1M1: LED7.1 U7.7 U10.11 U27.1 | length 1582.2
  Top Layer w15: U27.1 3822.4,3042.4 3840,3060 3840,3195 3985,3340 3985,3415 U10.11
  Bottom Layer w15: U10.11 3990,3435 4060,3505 4315,3505 4395,3585 4538.5,3585 LED7.1 4722.61,3769.11 4722.61,3967.62 U7.7
1M2: LED9.1 U7.1 U10.12 | length 1146.7
  Top Layer w15: U7.1 4125.01,3919.99 4175,3870 4346.91,3870 LED9.1
  Bottom Layer w15: U10.12 3890,3427.18 4032.82,3570 4245,3570 4441.7,3766.7 LED9.1
1M3: LED11.1 U7.2 U10.13 | length 759.9
  Bottom Layer w15: U10.13 3790,3427.18 4129.52,3766.7 LED11.1 4225.01,3811.51 U7.2
1M4: LED13.1 U7.6 U10.14 U27.2 | length 1967.4
  Top Layer w15: U10.14 3690,3412.82 3640,3362.82 3640,3082.55 3682.55,3040 3754.79,3040 3782.66,3012.13 3782.66,2997.46 U27.2 ; LED13.1 3971.7,3766.7 4035,3830 4035,4010 4075,4050 4545.01,4050 U7.6
  Bottom Layer w15: U10.14 3698.13,3428.13 3698.13,3453.13 3820,3575 3820,3695 3877.77,3752.77 3883.29,3752.77 3897.22,3766.7 LED13.1
1M_CLK: U10.9 U11.7 U12.4 | length 2438.2
  Top Layer w15: U10.9 4190,3412.82 4327.81,3275 5220,3275 v1(5740,2755)
  Bottom Layer w15: v1(5740,2755) 5880,2755 5930.06,2805.06 5930.06,2882.54 5934.74,2887.23 5934.74,2917.56 6130,3112.82 U11.7
1M_EN: U10.10 U31.4 | length 455.4
  Top Layer w15: U10.10 4090,3320 4140,3270 4140,2985.31
1S1: LED8.1 U9.7 U11.11 U18.1 | length 1589.7
  Top Layer w15: U18.1 5857.4,2997.08 5880.96,3020.64 5880.96,3185.96 6030,3335 U11.11
  Bottom Layer w15: U11.11 6030,3427.18 6112.81,3510 6280,3510 6345,3575 6540,3575 6726.25,3761.25 6761.69,3761.25 LED8.1 6761.08,3772.77 6761.08,3963.93 U9.7
1S2: LED10.1 U9.1 U11.12 | length 1148.8
  Top Layer w15: U9.1 6285.01,3840 6423.85,3840 LED10.1
  Bottom Layer w15: U11.12 5930,3438.68 5944.82,3453.5 5944.82,3454.82 6070,3580 6250,3580 6431.25,3761.25 6491.69,3761.25 LED10.1
1S3: LED12.1 U9.2 U11.13 | length 778.3
  Bottom Layer w15: U11.13 5830,3438.68 5844.82,3453.5 5844.82,3454.82 6165,3775 6218.85,3775 LED12.1 6227.15,3777.37 6260,3810.22 6260,3965.01 U9.2
1S4: LED14.1 U9.6 U11.14 U18.2 | length 1972.4
  Top Layer w15: U11.14 5730,3310 5680,3260 5680,3080 5715,3045 5799.23,3045 5820,3024.23 U18.2 ; LED14.1 6011.7,3766.7 6065,3820 6065,4020 6100,4055 6570.01,4055 U9.6
  Bottom Layer w15: U11.14 5730,3555 5926.25,3751.25 5928.71,3751.25 5944.16,3766.7 LED14.1
1S_CLK: U11.9 U28.4 | length 479.8
  Top Layer w15: U11.9 6230,3412.82 6305,3337.82 6305,3054.68 6247.4,2997.08 U28.4
1S_EN: U11.10 U33.4 | length 462
  Top Layer w15: U33.4 6080.59,3270.59 6130,3320 U11.10
10H1: LED15.1 U16.7 U19.3 | length 951.5
  Top Layer w15: LED15.1 1475,3681.7 1475,3180 1525,3130 U19.3
  Bottom Layer w15: LED15.1 1500.01,3876.72 U16.7
10H2: LED16.1 U16.1 U19.4 U30.2 | length 1675.6
  Top Layer w15: LED16.1 1193.3,3845 1480,3845 1675,3650 1675,3170 U19.4
  Bottom Layer w15: U16.1 905.21,3964.8 905.21,3924.79 1063.3,3766.7 LED16.1 ; U30.2 1617.34,2997.46 1617.34,3112.34 U19.4
10H_EN: U19.2 U29.4 | length 267.3
  Top Layer w15: U19.2 1425,2964.45 1502.6,2886.85 U29.4
10M1: LED1.1 U6.7 U10.3 | length 961.4
  Top Layer w15: LED1.1 3740,3562.22 3740,3315 3690,3265 U10.3
  Bottom Layer w15: LED1.1 3542.76,3773.95 3542.76,3962.78 U6.7
10M2: LED3.1 U6.1 U10.4 U15.1 | length 1766.5
  Top Layer w15: U6.1 2965.21,3954.79 2965.21,3924.79 3025,3865 3167.22,3865 LED3.1 3338.81,3840 3610,3840 3740,3710 3840,3610 3840,3360 3790,3310 U10.4
  Bottom Layer w15: U10.4 3790,3065 3822.6,3032.4 U15.1
10M3: LED5.1 U6.2 U10.5 U15.2 | length 1766.3
  Top Layer w15: LED5.1 3008.5,3766.7 3022.79,3752.41 3027.59,3752.41 3250,3530 3250,3250 v1(3550,2950)
  Bottom Layer w15: LED5.1 3050,3821.19 U6.2 ; v1(3550,2950) 3845,2950 3860,2965 3860,3030.14 3890,3060.14 U10.5
10M_EN: U10.2 U27.4 | length 300.4
  Top Layer w15: U10.2 3590,3044.45 3747.6,2886.85 U27.4
10S1: LED2.1 U8.7 U11.3 | length 955.6
  Top Layer w15: LED2.1 5780,3616.7 5780,3280 5730,3230 U11.3
  Bottom Layer w15: U8.7 5575.01,3821.69 LED2.1
10S2: LED4.1 U8.1 U11.4 U12.1 | length 1842.9
  Top Layer w15: U8.1 4975.01,3909.99 5010,3875 5249.2,3875 LED4.1 5450.8,3860 5680,3860 5880,3660 5880,3270 5831.25,3221.25 5831.25,3121.25 U11.4
  Bottom Layer w15: U11.4 5830,3065 5857.6,3037.4 U12.1
10S3: LED6.1 U8.2 U11.5 U12.2 | length 1732.7
  Bottom Layer w15: U8.2 5080.01,3965 5080.01,3771.7 LED6.1 5188.3,3870 5370,3870 5515,3725 5515,3645 5680,3480 5680,3370 5735,3315 5865,3315 5930,3250 U11.5 5930,3061.57 5897.34,3028.92 5897.34,2997.46 U12.2
10S_EN: U11.2 U18.4 | length 298.3
  Top Layer w15: U11.2 5630,3039.45 5782.6,2886.85 U18.4
+5: R21.2 R23.2 R25.2 R28.2 U10.16 U11.16 U12.5 U15.5 U18.5 U19.16 U20.5 U21.1 U21.4 U23.3 U24.16 U25.14 U27.5 U28.5 U29.5 U30.5 U31.5 U32.5 U33.5 U34.5 U35.5 U36.5 | length 18639.8
  Top Layer w15: U33.5 6029.41,2970.6 6054.78,2945.22 6124.68,2945.22 6172.6,2993.15 U28.5
  Top Layer w20: U29.5 1577.56,2884.73 1577.56,2807.44 v1(1580,2805) 1585,2800 1780,2800 1912.5,2932.5 ; U32.5 1993.43,3013.43 1912.5,2932.5 ; U34.5 2010.59,2834.41 1912.5,2932.5 ; R28.2 2989.82,2275 3179.82,2465 3406.52,2465 3418.24,2453.28 U20.5 ; v1(3100,3275) 3555,2820 v1(3825,2820) ; U27.5 3822.4,2822.6 v1(3825,2820) ; U31.5 4048.43,2968.43 3900,2820 ; U36.5 4116.17,2785 3975,2785 3940,2820 3900,2820 ; R21.2 4842.24,2410 5385,2410 5421.73,2373.27 U35.5@5421.73,2359.39 ; U11.16@5530,3405 U11.16 ; U18.5 5857.56,2884.73 5857.56,2822.44 v1(5860,2820) ; 6124.68,2945.22 6570.48,2945.22 U25.14 ; v1(3825,2820) 3900,2820
  Bottom Layer w20: U30.5 1577.76,2884.73 1577.76,2807.24 v1(1580,2805) ; R28.2 2830,2192.24 ; R25.2 3304.48,2192.24 ; U10.16 3490,3305 3520,3275 ; U15.5 3822.76,2884.73 3822.76,2822.24 v1(3825,2820) ; R23.2 3954.48,2192.24 ; R21.2 4624.48,2192.24 ; U11.16 5530,3412.82 5392.19,3275 5255,3275 ; U24.16 5579.99,2247.23 5572.23,2247.23 5517.24,2192.24 4624.48,2192.24 ; U24.16@5586.14,2247.23 5708.37,2125 6285,2125 6385,2025 6540,2025 6630,2115 6630,2640 6720,2730 U25.14 ; v1@5857.6,2821.12 5708.88,2821.12 5255,3275 ; U12.5 5857.76,2884.73 5857.76,2822.24 v1(5860,2820) ; v1(1580,2805) 1940,2805 2335,2410 U23.3 2338.52,2286.28 2388.72,2286.28 2440,2235 2440,1980 2483.74,1936.26 U21.1 U21.4 2806.26,1936.26 2830,1960 2830,2192.24 ; v1(1580,2805) 1445,2805 1235,3015 1235,3170 1235,3330 U19.16 1325,3360 1410,3275 v1(3100,3275) 3520,3275 ; 2830,2192.24 3304.48,2192.24 ; 3304.48,2192.24 3954.48,2192.24 ; 3520,3275 5255,3275 ; 3954.48,2192.24 4624.48,2192.24
+D5V: U6.3 U6.4 U6.16 U7.3 U7.4 U7.16 U8.3 U8.4 U8.16 U9.3 U9.4 U9.16 U16.3 U16.4 U16.16 U17.3 U17.4 U17.16 U21.2 U21.3 U21.5 U21.6 | length 10052
  Top Layer w20: v1(2765,2805) v1(2765,3485)
  Bottom Layer w20: U16.16 900.01,4169.99 965,4105 1075,4105 ; U16.4 U16.3 1100.01,4079.99 1075,4105 ; U17.16 2090,4135 2060,4105 ; U17.4 U17.3 2290,4075 2260,4105 ; U21.3 2564.8,2101.97 2564.8,2126.75 2565,2126.95 2565,2605 v1(2765,2805) ; v1(2765,3485) 2765,3540 2875,3650 2875,4045 2930,4100 2930,4105 ; U6.16 2950,4125 2930,4105 ; U6.4 U6.3 3150,4080 3125,4105 ; U7.16 4125.01,4120.01 4110,4105 ; U7.4 U7.3 4325.01,4079.99 4300,4105 ; U8.16 4975.01,4125.01 4955,4105 ; U8.4 U8.3 5175.01,4084.99 5155,4105 ; 6140.54,4105.04 6155.01,4119.52 U9.16 ; U9.4 U9.3 6355,4064.22 6314.22,4105 5155,4105 ; 1075,4105 2060,4105 ; 2060,4105 2260,4105 ; 2260,4105 2930,4105 ; 2930,4105 3125,4105 ; 3125,4105 4110,4105 ; 4110,4105 4300,4105 ; 4300,4105 4955,4105 ; 4955,4105 5155,4105
GND: C1.1 C2.1 C3.1 C4.1 C5.1 C6.1 DC1.2 DC1.3 R1.2 R2.2 R3.2 R4.2 R5.2 R6.2 R7.1 R8.1 R9.1 R10.1 R11.1 R12.1 R13.1 R14.1 R15.2 R16.2 R17.1 R18.1 R19.1 R20.1 SW1.3 SW1.4 SW2.3 SW2.4 SW3.3 SW3.4 U1.2 U2.3 U2.5 U2.8 U3.3 U3.5 U3.8 U4.3 U4.5 U4.8 U5.3 U5.5 U5.8 U6.5 U6.8 U7.5 U7.8 U8.5 U8.8 U9.5 U9.8 U10.1 U10.8 U10.15 U11.1 U11.8 U11.15 U12.3 U13.3 U13.5 U13.8 U14.3 U14.5 U14.8 U15.3 U16.5 U16.8 U17.5 U17.8 U18.3 U19.1 U19.8 U20.3 U23.2 U24.8 U25.4 U25.6 U25.7 U26.2 U26.3 U26.5 U26.6 U27.3 U28.3 U29.3 U30.3 U31.3 U32.3 U33.3 U34.3 U35.3 U36.3
H_RES: U19.7 U19.15 U30.4 | length 1096.4
  Top Layer w15: v1(1870,3335) 1925,3280 U19.7
  Bottom Layer w15: U19.15 1425,3412.82 1502.82,3335 v1(1870,3335) ; U30.4 1697.07,2884.89 1925,3112.82 U19.7
NetC1_2: C1.2 R22.1 U35.2 | length 434.9
  Top Layer w15: R22.1 5266.12,2328.88 5360.64,2328.88 U35.2
  Top Layer w20: R22.1 5265,2235 5376.58,2123.42 C1.2
NetC2_2: C2.2 R24.1 U36.2 | length 1016.2
  Top Layer w15: U36.2 4240,2810 4585,2465 R24.1
  Top Layer w20: R24.1 4585,2245 4701.57,2128.43 C2.2
NetC3_2: C3.2 R26.1 U34.2 | length 2334.9
  Top Layer w15: U34.2 2159.54,2858.7 2281.3,2858.7 2425,2715 3527.76,2715 R26.1
  Top Layer w20: R26.1 3915,2205 3990,2130 4116.65,2130 C3.2
NetC4_2: C4.2 R27.1 U24.11 X1.2 | length 476.4
  Bottom Layer w15: C4.2 5877.5,2402.5 X1.2@6006,2402.5 ; R27.1 5936.61,2476.88 X1.2 6008.5,2336.5 U24.11
NetC5_2: C5.2 R27.2 U24.10 X1.1 | length 523.5
  Bottom Layer w15: U24.10 6171.77,2273.22 6171.77,2304.72 X1.1 6174.13,2405 6193.15,2424.02 C5.2 6214.67,2424.02 6340.65,2550 R27.2
NetC6_2: C6.2 R29.1 U20.2 | length 475.6
  Top Layer w15: R29.1 3312.24,2390 U20.2
  Top Layer w20: R29.1 3250,2220 3351.58,2118.42 C6.2
NetDC1_1: DC1.1 U1.1 U22.1 U22.4 | length 1471.7
  Bottom Layer w20: DC1.1 1043.8,2365 1335,2365 U1.1 1768.74,1931.26 U22.1 U22.4
NetLED1_2: LED1.2 R1.1 | length 459.2
  Bottom Layer w15: R1.1 3345.5,3476.69 LED1.2
NetLED2_2: LED2.2 R2.1 | length 643.7
  Top Layer w15: R2.1 5138.31,3550 5513.3,3550 LED2.2
NetLED3_2: LED3.2 R3.1 | length 326.7
  Bottom Layer w15: R3.1 3041.24,3477.94 3041.24,3516.24 3182.52,3657.52 3256.33,3657.52 LED3.2
NetLED4_2: LED4.2 R4.1 | length 263.5
  Bottom Layer w15: R4.1 5180,3482.95 5357.5,3660.45 LED4.2
NetLED5_2: LED5.2 R5.1 | length 219.2
  Bottom Layer w15: R5.1 2925,3596.19 LED5.2
NetLED6_2: LED6.2 R6.1 | length 648.4
  Bottom Layer w15: LED6.2 4985,3566.7 4985,3445 5060,3370 5188.31,3370 R6.1
NetLED7_2: LED7.2 R7.2 | length 202.4
  Bottom Layer w15: LED7.2 4720.21,3653.72 4750,3623.92 R7.2
NetLED8_2: LED8.2 R8.2 | length 213.7
  Bottom Layer w15: R8.2 6767.15,3533.84 LED8.2
NetLED9_2: LED9.2 R9.2 | length 283
  Top Layer w15: LED9.2 4459.34,3657.57 4487.43,3657.57 4631.26,3513.74 4631.26,3480.44 R9.2
NetLED10_2: LED10.2 R10.2 | length 230.5
  Top Layer w15: LED10.2 6595,3568.85 R10.2
NetLED11_2: LED11.2 R11.2 | length 420.4
  Top Layer w15: LED11.2 4333.3,3666.7 4339.99,3660.01 4520,3480 R11.2
NetLED12_2: LED12.2 R12.2 | length 331.6
  Top Layer w15: LED12.2 6289.99,3666.7 R12.2
NetLED13_2: LED13.2 R13.2 | length 573.5
  Top Layer w15: LED13.2 4018.3,3666.7 4100,3585 4296.69,3585 R13.2
NetLED14_2: LED14.2 R14.2 | length 486.6
  Top Layer w15: LED14.2 6068.85,3555 6286.69,3555 R14.2
NetLED15_2: LED15.2 R15.1 | length 348.7
  Bottom Layer w15: R15.1 1199.99,3476.69 LED15.2
NetLED16_2: LED16.2 R16.1 | length 235.6
  Bottom Layer w15: R16.1 1005,3556.7 LED16.2
NetLED17_2: LED17.2 R17.2 | length 192.2
  Bottom Layer w15: R17.2 2577.61,3479.3 2577.61,3664.1 LED17.2
NetLED18_2: LED18.2 R18.2 | length 254.8
  Top Layer w15: LED18.2 2452.36,3517.89 2452.36,3484.37 R18.2
NetLED19_2: LED19.2 R19.2 | length 391.3
  Top Layer w15: LED19.2 2149.47,3666.7 R19.2
NetLED20_2: LED20.2 R20.2 | length 547.4
  Top Layer w15: LED20.2 1871.92,3545 2150.62,3545 R20.2
NetR21_1: R21.1 R22.2 SW1.1 SW1.2 | length 677.6
  Top Layer w20: R21.1 5122.76,2280.53 5162.95,2240.34 SW1.2
  Bottom Layer w20: SW1.1 SW1.2 5265,2006.53 R22.2
NetR23_1: R23.1 R24.2 SW2.1 SW2.2 | length 662.6
  Top Layer w20: R23.1 4442.76,2270.53 4482.95,2230.34 SW2.2
  Bottom Layer w20: SW2.1 SW2.2 4585,2011.53 R24.2
NetR25_1: R25.1 R26.2 SW3.1 SW3.2 | length 659.3
  Top Layer w20: R25.1 3792.76,2264.18 3810.91,2246.03 SW3.2
  Bottom Layer w20: SW3.1 SW3.2 3915,2000.9 R26.2
NetR28_1: R28.1 R29.2 U26.1 U26.4 | length 654.6
  Top Layer w20: U26.1 3152.76,2138.09 R28.1
  Bottom Layer w20: U26.4 U26.1 3110.35,2091.8 3158.2,2091.8 3242.35,2007.65 3242.35,1929.9 R29.2
NetR30_1: R30.1 U6.13 | length 656.5
  Bottom Layer w15: R30.1 3025,4668.31 3025,4495 U6.13
NetR30_2: R30.2 U2.7 | length 493.9
  Bottom Layer w15: R30.2 3499.51,4785 U2.7
NetR31_1: R31.1 U6.12 | length 706
  Top Layer w15: R31.1 3000,4578.31 3000,4410 3075,4335 3285,4335 U6.12
NetR31_2: R31.2 U2.6 | length 641.6
  Bottom Layer w15: R31.2 3484.51,4670 U2.6
NetR32_1: R32.1 U6.11 | length 1016.2
  Bottom Layer w15: R32.1 3095,4828.31 3095,4545 3290,4350 3370,4350 U6.11
NetR32_2: R32.2 U2.4 | length 731.7
  Top Layer w15: R32.2 3723.03,4613.66 U2.4
NetR33_1: R33.1 U6.10 | length 1077.4
  Top Layer w15: R33.1 3075,4733.31 3075,4435 3135,4375 3445,4375 U6.10
NetR33_2: R33.2 U2.2 | length 533.9
  Top Layer w15: R33.2 3523.03,4698.66 U2.2
NetR34_1: R34.1 U6.9 | length 429.2
  Top Layer w15: U6.9 3825,4095 R34.1
NetR34_2: R34.2 U2.1 | length 452.8
  Bottom Layer w15: U2.1 3497.55,4375 3760,4375 3796.26,4338.74 3802.09,4338.74 3814.14,4326.69 R34.2
NetR35_1: R35.1 U6.15 | length 229.9
  Bottom Layer w15: R35.1 2914.45,4437.58 2914.45,4405.55 U6.15
NetR35_2: R35.2 U2.9 | length 1018.2
  Bottom Layer w15: R35.2 3175,4590.4 3175,4985 3260,5070 3470,5070 3523.03,5016.97 U2.9
NetR36_1: R36.1 U6.14 | length 389.9
  Bottom Layer w15: R36.1 2970,4497.63 2970,4445 3144.99,4270.01 U6.14
NetR36_2: R36.2 U2.10 | length 645
  Bottom Layer w15: R36.2 3220,4661.01 3220,4920 3260,4960 3374.51,4960 U2.10
NetR37_1: R37.1 U7.13 | length 707.7
  Top Layer w15: U7.13 4425,4275 4680,4530 4680,4620 4835.45,4775.45 4836.28,4775.45 4850.83,4790 R37.1
NetR37_2: R37.2 U3.7 | length 301
  Bottom Layer w15: U3.7 4440.63,4816.98 4440.63,4797.67 R37.2
NetR38_1: R38.1 U7.12 | length 778.4
  Bottom Layer w15: U7.12 4675,4419.99 4675,4725 4855,4905 R38.1
NetR38_2: R38.2 U3.6 | length 144.6
  Bottom Layer w15: U3.6 4349.09,5006.37 4448.31,4907.15 R38.2
NetR39_1: R39.1 U7.11 | length 503
  Bottom Layer w15: U7.11 4735,4379.99 4735,4548.31 R39.1
NetR39_2: R39.2 U3.4 | length 314.9
  Bottom Layer w15: U3.4 4250.49,4450.92 4250.49,4488.92 4428.89,4667.32 4440.63,4667.32 R39.2
NetR40_1: R40.1 U7.10 | length 349.5
  Bottom Layer w15: U7.10 4730.01,4270.01 4800,4340 4800,4498.31 R40.1
NetR40_2: R40.2 U3.2 | length 447.7
  Top Layer w15: U3.2 4049.09,4454.09 4150,4555 4443.31,4555 R40.2
NetR41_1: R41.1 U7.9 | length 190.2
  Bottom Layer w15: U7.9 4825,4273 4861.69,4309.69 R41.1
NetR41_2: R41.2 U3.1 | length 567.4
  Bottom Layer w15: U3.1 4033.61,4365 4368.31,4365 R41.2
NetR42_1: R42.1 U7.15 | length 537.1
  Top Layer w15: R42.1 3945,4040 4050,4145 4160,4145 4225,4210 U7.15
NetR42_2: R42.2 U3.9 | length 774.7
  Bottom Layer w15: R42.2 3885,4386.69 3885,4844.43 U3.9
NetR43_1: R43.1 U7.14 | length 1033.8
  Bottom Layer w15: U7.14 4410.01,4355 4515,4355 4610,4450 4610,4768.31 R43.1
NetR43_2: R43.2 U3.10 | length 549.5
  Bottom Layer w15: U3.10 4015.57,5075 4393.31,5075 R43.2
NetR44_1: R44.1 U8.13 | length 662.4
  Top Layer w15: R44.1 5025.49,4712.81 5025.49,4519.52 U8.13
NetR44_2: R44.2 U4.7 | length 487.2
  Bottom Layer w15: R44.2 5540.5,4795 U4.7
NetR45_1: R45.1 U8.12 | length 657
  Bottom Layer w15: R45.1 5055,4563.31 5055,4465 5185,4335 5310.01,4335 U8.12
NetR45_2: R45.2 U4.6 | length 636.9
  Bottom Layer w15: R45.2 5520.5,4675 U4.6
NetR46_1: R46.1 U8.11 | length 1007.5
  Bottom Layer w15: R46.1 5050,4918.31 5050,4640 5320,4370 5375.01,4370 U8.11
NetR46_2: R46.2 U4.4 | length 739.5
  Top Layer w15: R46.2 5356.69,5014.14 5371.24,4999.59 5371.24,4998.76 5755,4615 U4.4
NetR47_1: R47.1 U8.10 | length 1039.3
  Top Layer w15: R47.1 5075,4778.31 5075,4545 5275,4345 5510,4345 5575,4280 U8.10
NetR47_2: R47.2 U4.2 | length 541.6
  Top Layer w15: R47.2 5555,4711.69 U4.2
NetR48_1: R48.1 U8.9 | length 437.5
  Top Layer w15: U8.9 5870,4075.01 R48.1
NetR48_2: R48.2 U4.1 | length 475.4
  Bottom Layer w15: U4.1 5455,4439.64 5467.65,4427 5467.65,4422.35 5540,4350 5841.15,4350 5864.46,4326.69 R48.2
NetR49_1: R49.1 U8.15 | length 229.5
  Bottom Layer w15: R49.1 4950.06,4438.25 4950.06,4394.94 5015,4330 U8.15
NetR49_2: R49.2 U4.9 | length 1056.2
  Bottom Layer w15: R49.2 5170,4631.69 5170,4960 5290,5080 5484.5,5080 U4.9
NetR50_1: R50.1 U8.14 | length 386.8
  Bottom Layer w15: R50.1 5010,4494.14 5010,4435.01 U8.14
NetR50_2: R50.2 U4.10 | length 661.5
  Bottom Layer w15: R50.2 5220,4697.52 5220,4875 5315,4970 5415.5,4970 U4.10
NetR51_1: R51.1 U9.13 | length 702.9
  Top Layer w15: U9.13 6455,4282.97 6680,4507.97 6680,4573.31 R51.1
NetR51_2: R51.2 U5.7 | length 305.8
  Bottom Layer w15: U5.7 6275,5003.9 6483.31,4795.6 R51.2
NetR52_1: R52.1 U9.12 | length 781.3
  Bottom Layer w15: U9.12 6720,4434.99 6720,4750 6880,4910 R52.1
NetR52_2: R52.2 U5.6 | length 140.2
  Bottom Layer w15: U5.6 6375,5008.9 6473.31,4910.6 R52.2
NetR53_1: R53.1 U9.11 | length 499.3
  Bottom Layer w15: U9.11 6765,4380.01 6765,4551.64 R53.1
NetR53_2: R53.2 U5.4 | length 346
  Bottom Layer w15: U5.4 6275,4545 6403.33,4673.33 R53.2
NetR54_1: R54.1 U9.10 | length 341.2
  Bottom Layer w15: U9.10 6810,4325.01 6810,4479.98 R54.1
NetR54_2: R54.2 U5.2 | length 442.3
  Top Layer w15: U5.2 6181.17,4556.67 R54.2
NetR55_1: R55.1 U9.9 | length 183.1
  Bottom Layer w15: U9.9 6855.01,4400.88 6886.69,4432.56 R55.1
NetR55_2: R55.2 U5.1 | length 573.1
  Bottom Layer w15: U5.1 6070.5,4355 6380,4355 6465,4440 R55.2
NetR56_1: R56.1 U9.15 | length 524.2
  Top Layer w15: R56.1 5985,4035 6110,4160 6205,4160 6255.01,4210.01 U9.15
NetR56_2: R56.2 U5.9 | length 776.7
  Bottom Layer w15: R56.2 5916.69,4395 5916.69,4851.19 U5.9
NetR57_1: R57.1 U9.14 | length 1048.5
  Bottom Layer w15: U9.14 6429.99,4345 6555,4345 6555.86,4344.14 6665,4453.28 6665,4801.64 R57.1
NetR57_2: R57.2 U5.10 | length 551
  Bottom Layer w15: U5.10 6045.5,5080 6416.64,5080 R57.2
NetR58_1: R58.1 U16.13 | length 652.4
  Bottom Layer w15: R58.1 985,4668.31 985,4485.01 U16.13
NetR58_2: R58.2 U13.7 | length 496.7
  Bottom Layer w15: R58.2 1465.94,4785 U13.7
NetR59_1: R59.1 U16.12 | length 687.2
  Top Layer w15: R59.1 940,4598.31 940,4445 1040,4345 1225.01,4345 U16.12
NetR59_2: R59.2 U13.6 | length 644.3
  Bottom Layer w15: R59.2 1450.94,4670 U13.6
NetR60_1: R60.1 U16.11 | length 1020.9
  Bottom Layer w15: R60.1 1065,4818.31 1065,4510 1210,4365 1305.01,4365 U16.11
NetR60_2: R60.2 U13.4 | length 735.9
  Top Layer w15: R60.2 1686.86,4609.83 U13.4
NetR61_1: R61.1 U16.10 | length 976.6
  Top Layer w15: R61.1 1065,4703.31 1065,4560 1270,4355 1415.01,4355 U16.10
NetR61_2: R61.2 U13.2 | length 538.1
  Top Layer w15: R61.2 1281.69,4889.14 1296.24,4874.59 1296.24,4873.76 1486.86,4683.14 U13.2
NetR62_1: R62.1 U16.9 | length 437.5
  Top Layer w15: U16.9 1795,4075.01 R62.1
NetR62_2: R62.2 U13.1 | length 462.8
  Bottom Layer w15: U13.1 1468.78,4365 1764.94,4365 1795,4334.94 R62.2
NetR63_1: R63.1 U16.15 | length 226.6
  Bottom Layer w15: R63.1 867.06,4436.25 867.06,4402.95 U16.15
NetR63_2: R63.2 U13.9 | length 1022.7
  Bottom Layer w15: R63.2 1140,4576.69 1140,4985 1240,5085 1407.78,5085 U13.9
NetR64_1: R64.1 U16.14 | length 383
  Bottom Layer w15: R64.1 940,4478.31 940,4430.01 U16.14
NetR64_2: R64.2 U13.10 | length 633.4
  Bottom Layer w15: R64.2 1190,4641.69 1190,4920 1230,4960 1340.94,4960 U13.10
NetR65_1: R65.1 U17.13 | length 686.9
  Top Layer w15: U17.13 2640,4520.02 2640,4587.97 2826.69,4774.66 R65.1
NetR65_2: R65.2 U14.7 | length 312.9
  Bottom Layer w15: U14.7 2218.55,5000.29 2218.55,4970.75 R65.2
NetR66_1: R66.1 U17.12 | length 762.5
  Bottom Layer w15: U17.12 2600,4380 2600,4666.31 R66.1
NetR66_2: R66.2 U14.6 | length 154.5
  Bottom Layer w15: U14.6 2312.92,4999.65 2413.31,4899.27 R66.2
NetR67_1: R67.1 U17.11 | length 487.1
  Bottom Layer w15: U17.11 2670,4350 2670,4502.31 R67.1
NetR67_2: R67.2 U14.4 | length 306.4